# Altium PCB PCB.PcbDoc (part 1 of 2)
Units mil, origin at the board's own origin, x right, y up, seen from the top; angles counter-clockwise.
Board outline 1692.91 x 1181.1 mil, 2 copper layers (Top Layer, Bottom Layer); 68 components, 59 nets, 274 pads, 55 vias.
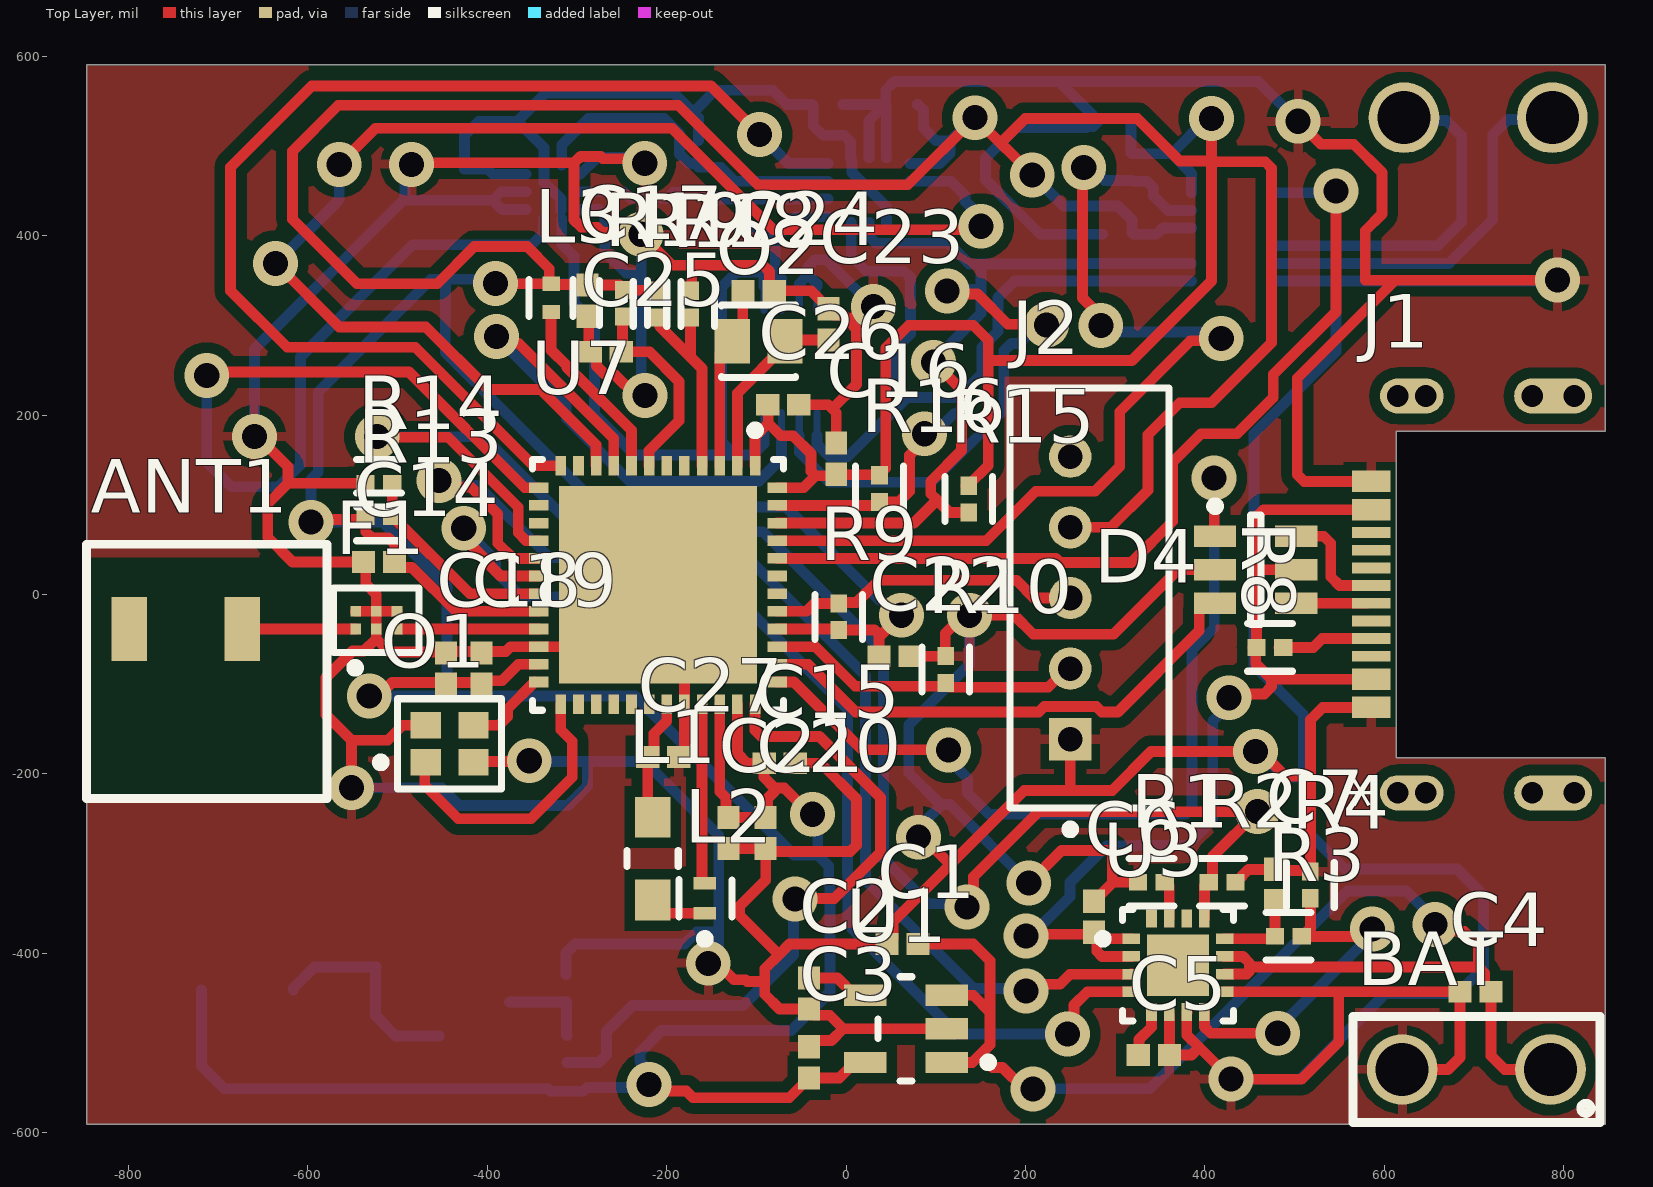
[diagram p0: Top Layer view]
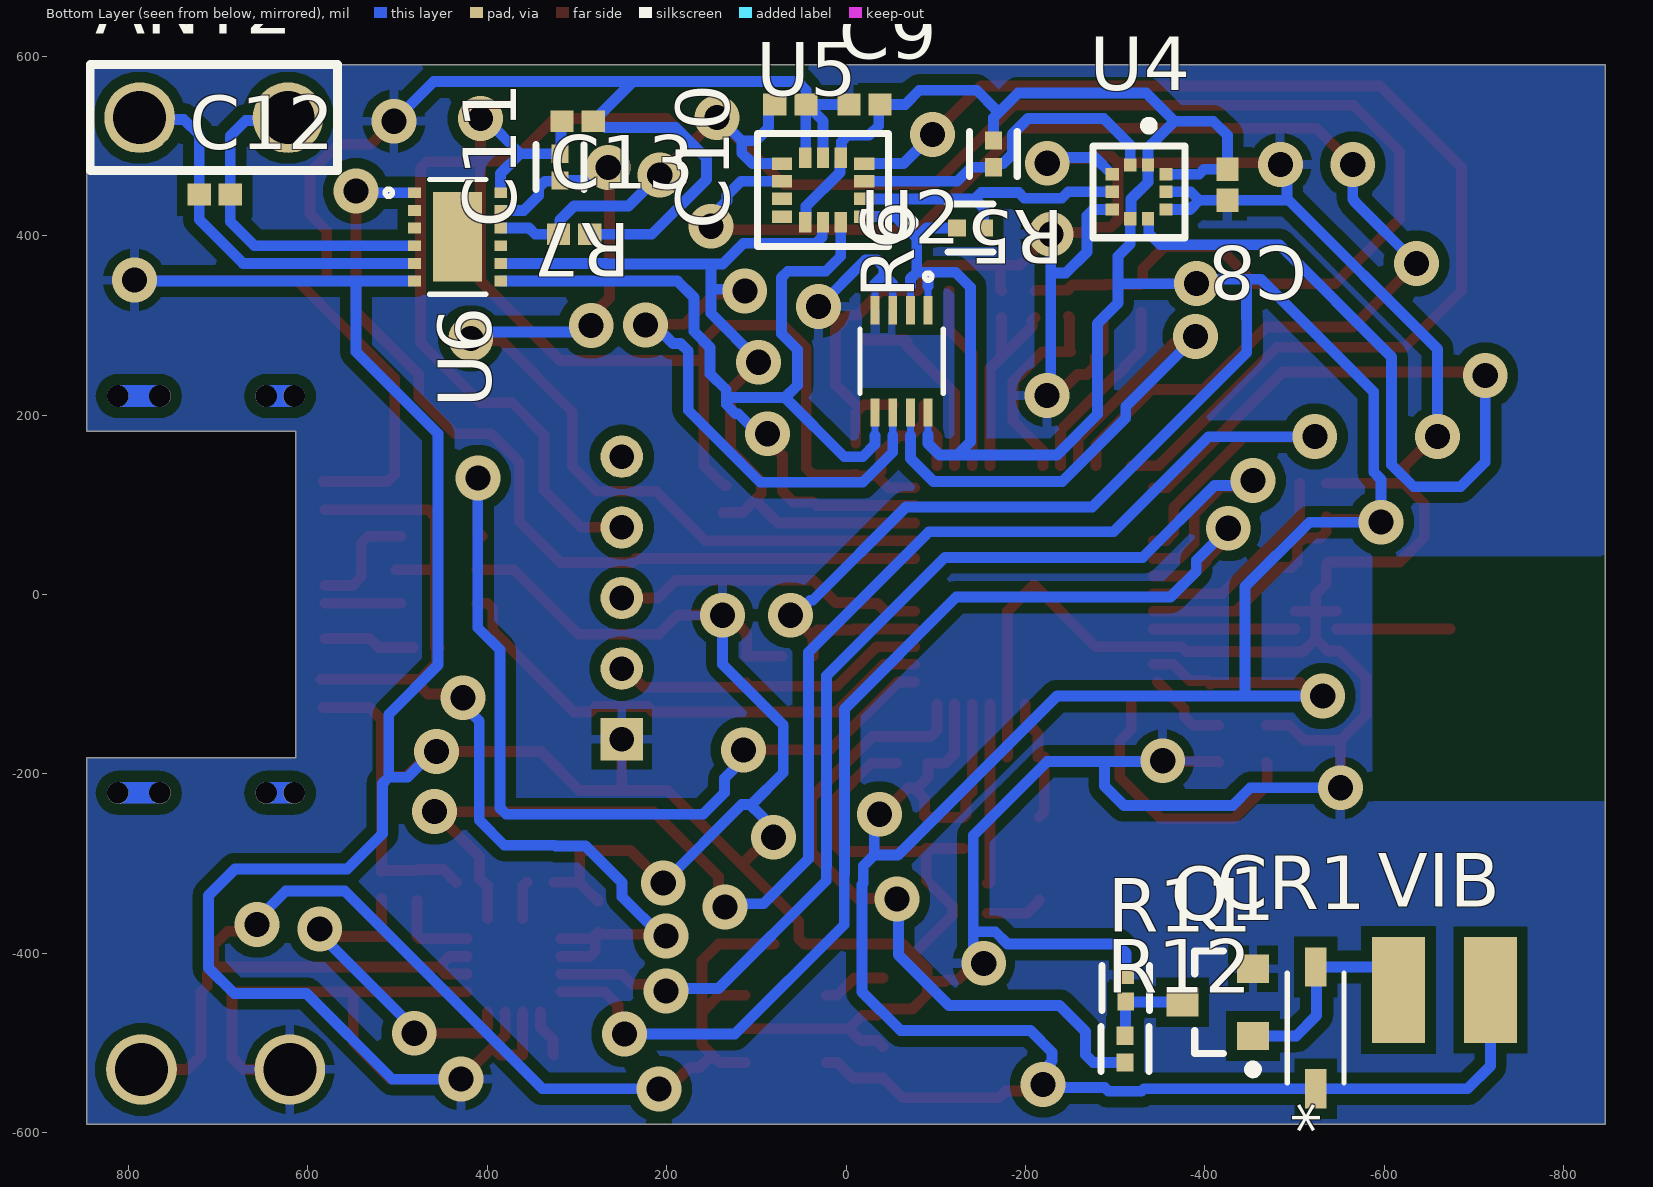
[diagram p1: Bottom Layer view, seen from below]
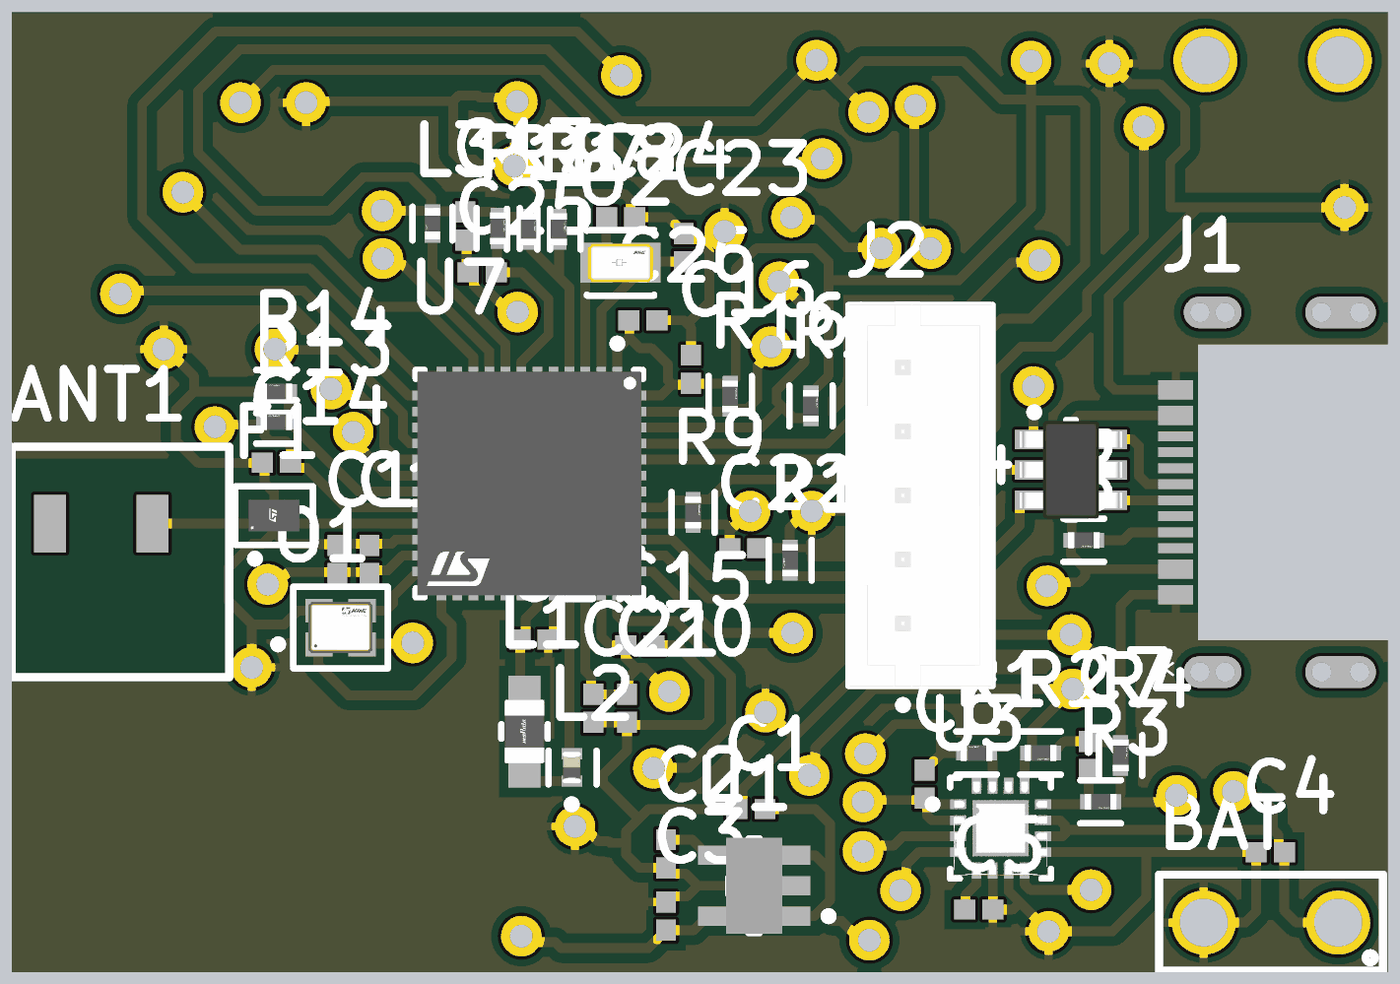
[diagram p2: 3D render of the assembled board from above, using the file's embedded part models]
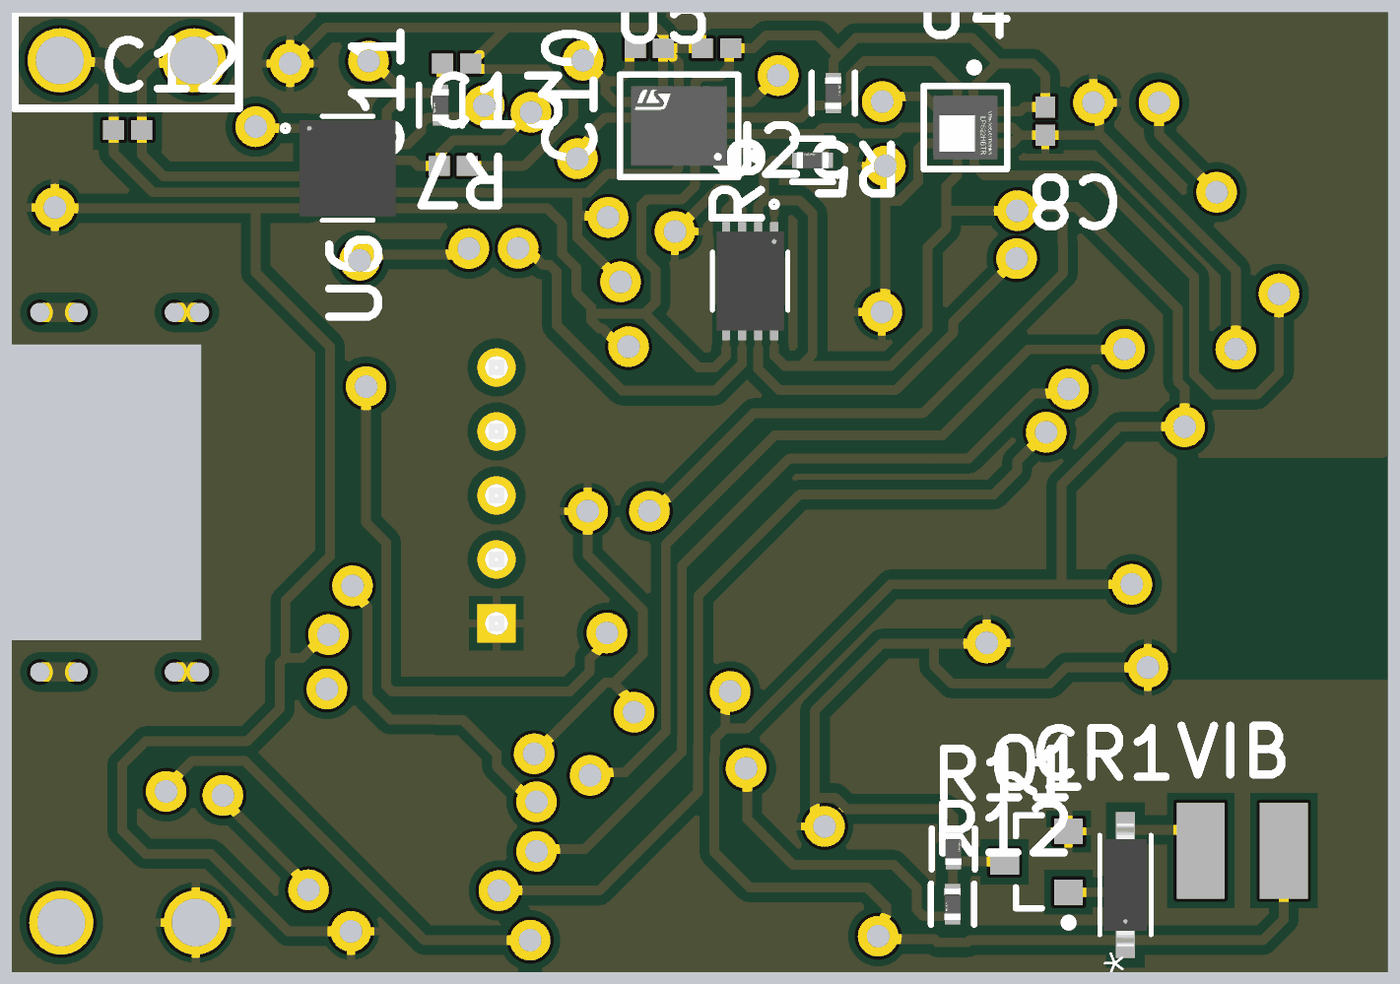
[diagram p3: 3D render of the assembled board from below, using the file's embedded part models]

## Layer stack, top to bottom
Top Solder: solder mask 0.4, Solder Resist, Dk 3.5
Top Layer: signal copper 1.4
Dielectric 1: dielectric 12.6, FR-4, Dk 4.8
Bottom Layer: signal copper 1.4
Bottom Solder: solder mask 0.4, Solder Resist, Dk 3.5

## Board outline
-846.46,-590.55 -846.46,590.55 846.46,590.55 846.46,182.09 613.19,182.09 613.19,-182.09 846.46,-182.09 846.46,-590.55

## Design rules (kind name [scope] priority, off if disabled: settings)
Clearance [All] p1: gap=12 ignorepadtopadclearanceinfootprint=FALSE except(0: Arc-Hole Track-Hole SMDPad-Hole THPad-Hole Via-Hole Fill-Hole Poly-Hole Region-Hole Text-Hole; 5: SMDPad-SMDPad SMDPad-THPad THPad-THPad; 6: Arc-SMDPad Arc-THPad Arc-Text Track-SMDPad Track-THPad Track-Text SMDPad-Text THPad-Text Via-Text Fill-Text Poly-Text Region-Text Text-Text; 7: Arc-Arc Arc-Track Arc-Via Track-Track Track-Via SMDPad-Via THPad-Via Via-Via)
PolygonConnect [All] p1: connectstyle=Relief reliefconductorwidth=10 reliefentries=4 polygonreliefangle="90 Angle" airgapwidth=10
RoomDefinition U_STM32WB55CGU6 [InComponentClass('U_STM32WB55CGU6')] p1: confinementstyle=ConfineIn formatcopy=TRUE lockcomponents=FALSE outline 168.31,-649.61 168.31,661.42 -885.83,661.42 -885.83,-649.61
RoomDefinition U_USB [InComponentClass('U_USB')] p2: confinementstyle=ConfineIn formatcopy=TRUE lockcomponents=FALSE outline 374.02,-275.59 937.01,-275.59 937.01,275.59 374.02,275.59
RoomDefinition U_LPS22HBTR [InComponentClass('U_LPS22HBTR')] p3: confinementstyle=ConfineIn formatcopy=TRUE lockcomponents=FALSE outline -200.79,373.52 -200.79,661.42 -562.99,661.42 -562.99,373.52
RoomDefinition U_M24512-DFMC6TG [InComponentClass('U_M24512-DFMC6TG')] p4: confinementstyle=ConfineIn formatcopy=TRUE lockcomponents=FALSE outline -168.34,373.03 -168.34,50.2 45.28,50.2 45.28,373.03
RoomDefinition U_LD3985M33R [InComponentClass('U_LD3985M33R')] p5: confinementstyle=ConfineIn formatcopy=TRUE lockcomponents=FALSE outline -108.27,-648.62 169.29,-648.62 169.29,-310.04 -108.27,-310.04
RoomDefinition U_SWD [InComponentClass('U_SWD')] p6: confinementstyle=ConfineIn formatcopy=TRUE lockcomponents=FALSE outline 374.02,-275.59 374.02,275.59 -47.24,275.59 -47.24,-275.59
RoomDefinition U_ST25DV64K-JFR6D3 [InComponentClass('U_ST25DV64K-JFR6D3')] p7: confinementstyle=ConfineIn formatcopy=TRUE lockcomponents=FALSE outline 169.29,660.43 169.29,275.59 937.01,275.59 937.01,660.43
RoomDefinition U_LSM6DSRXTR [InComponentClass('U_LSM6DSRXTR')] p8: confinementstyle=ConfineIn formatcopy=TRUE lockcomponents=FALSE outline -199.8,661.42 -199.8,373.52 169.29,373.52 169.29,661.42
RoomDefinition U_L6924D013TR [InComponentClass('U_L6924D013TR')] p9: confinementstyle=ConfineIn formatcopy=TRUE lockcomponents=FALSE outline 169.29,-649.61 937.01,-649.61 937.01,-275.59 169.29,-275.59
RoomDefinition U_VIBRO [InComponentClass('U_VIBRO')] p10: confinementstyle=ConfineIn formatcopy=TRUE lockcomponents=FALSE outline -790.35,-309.06 -790.35,-649.61 -252.95,-649.61 -252.95,-309.06
RoutingVias [All] p1: holewidth=28 width=50 viastyle="Through Hole" minholewidth=28 minwidth=50 maxholewidth=28 maxwidth=50
SolderMaskExpansion [All] p1: expansion=4 istentingtop=FALSE
Width [All] p1: maxlimit=12 minlimit=6 preferedwidth=8 minimp=50.000000 maximp=50.000000 favimp=50.000000
30 further rules are at their usual default settings.

## Classes and differential pairs
component class U_VIBRO: CR1 Q1 R11 R12 VIB
component class U_USB: D4 J1 R8
component class U_SWD: J2 R9 R10
component class U_STM32WB55CGU6: ANT1 C14 C15 C16 C17 C18 C19 C20 C21 C22 C23 C24 C25 C26 C27 F1 L1 L2 L3 O1 O2 R13 R14 R15 R16 R17 R18 R19 U7
component class U_ST25DV64K-JFR6D3: ANT2 C11 C12 C13 R7 U6
component class U_M24512-DFMC6TG: U2
component class U_LSM6DSRXTR: C9 C10 R5 R6 U5
component class U_LPS22HBTR: C8 U4
component class U_LD3985M33R: C1 C2 C3 U1
component class U_L6924D013TR: BAT C4 C5 C6 C7 R1 R2 R3 R4 U3

## Components (designator, comment, footprint, x,y, rotation, side; value= is the part's Value field where it differs from the comment)
ANT1 "KH3216-A55" KH3216-A55 -574.8,-231.44 r90 top
ANT2 "AT" AC 704.72,531.5 r0 bottom
BAT "Battery" Battery 702.76,-529.53 r180 top
C1 "10 uF" CAPC1005X55X25NL05T10 62.99,-389.76 r0 top
C2 "10 nF" CAPC1005X55X25NL05T10 -41.34,-444.88 r90 top
C3 "1 uF" CAPC1005X55X25NL05T10 -41.34,-521.65 r270 top
C4 "1 uF" CAPC1005X55X25NL05T10 701.77,-442.91 r0 top
C5 "330 pF" CAPC1005X55X25NL05T10 343.25,-513.39 r0 top
C6 "1 uF" CAPC1005X55X25NL05T10 276.57,-359.25 r90 top
C7 "1 uF" CAPC1005X55X25NL05T10 478.35,-323.82 r270 top
C8 "4.7 uF" CAPC1005X55X25NL05T10 -425.2,456.69 r90 bottom
C9 "100 nF" CAPC1005X55X25NL05T10 -20.67,546.26 r180 bottom
C10 "100 nF" CAPC1005X55X25NL05T10 62.01,546.26 r0 bottom
C11 "470 nF" CAPC1005X55X25NL05T10 299.21,527.56 r0 bottom
C12 "0 uF" CAPC1005X55X25NL05T10 703.74,445.87 r0 bottom
C13 "1 uF" CAPC1005X55X25NL05T10 303.15,401.57 r180 bottom
C14 "100 nF" CAPC1005X55X25NL05T10 -520.67,36.28 r180 top
C15 "100 nF" CAPC1005X55X25NL05T10 -73.82,-188.13 r180 top
C16 "100 nF" CAPC1005X55X25NL05T10 -10.83,151.44 r90 top
C17 "100 nF" CAPC1005X55X25NL05T10 -288.39,327.62 r90 top
C18 "100 nF" CAPC1005X55X25NL05T10 -445.87,-82.68 r90 top
C19 "100 pF" CAPC1005X55X25NL05T10 -406.5,-82.68 r270 top
C20 "4.7 uF" CAPC1005X55X25NL05T10 -89.57,-265.89 r90 top
C21 "100 nF" CAPC1005X55X25NL05T10 -130.91,-265.89 r270 top
C22 "100 nF" CAPC1005X55X25NL05T10 54.13,-68.9 r180 top
C23 "4.3 pF" CAPC1005X55X25NL05T10 -19.68,301.04 r90 top
C24 "4.3 pF" CAPC1005X55X25NL05T10 -97.44,338.44 r180 top
C25 "100 nF" CAPC1005X55X25NL05T10 -267.72,270.53 r0 top
C26 "100 nF" CAPC1005X55X25NL05T10 -69.88,211.47 r180 top
C27 "4.7 uF" CAPC1005X55X25NL05T10 -203.74,-181.24 r0 top
CR1 "BAT43W-7-F" SOD123_DIO -523.62,-483.27 r90 bottom
D4 "USBLC6-2SC6" STM-SOT23-6L_V 456.69,27.56 r0 top
F1 "MLPF-WB55-01E3" FP-MLPF-WB55-01E3-MFG -523.62,-28.68 r90 top
J1 "USB4510-03-1-A" USB4510-03-1-A_GCT 743.11,0 r90 top
J2 "B5B-PH-K-S(LF)(SN)" FP-B5B-PH-K-S_LF_SN-MFG 271.65,-3.94 r90 top
L1 "10uh" FP-LQM21FN_70-MFG -215.55,-294.43 r90 top
L2 "10nh" FP-LQG15WH_02-MFG -157.48,-338.72 r90 top
L3 "FBH1005-601Y" FP-BLM15-0_05-MFG -328.74,330.57 r270 top
O1 "NX2016SA-32MHZ" FP-NX2016SA-MFG -441.93,-166.48 r0 top
O2 "NX2012SA-32.768K" FP-NX2012SA-MFG -97.44,282.34 r180 top
Q1 "DMG3420U-7" DIOD-SOT23-3_B_V -414.37,-454.72 r0 bottom
R1 "130 Kohm" FP-RC1005-IPC_C 340.55,-320.87 r180 top
R2 "3.3 Kohm" FP-RC1005-IPC_C 419.29,-320.87 r0 top
R3 "1 Kohm" FP-RC1005-IPC_C 493.11,-380.91 r0 top
R4 "470 ohm" FP-RC1005-IPC_C 517.72,-323.82 r90 top
R5 "10 Kohm" FP-RC1005-IPC_C -164.37,491.14 r90 bottom
R6 "10 Kohm" FP-RC1005-IPC_C -138.78,408.46 r0 bottom
R7 "4.7 Kohm" FP-RC1005-IPC_C 318.9,476.38 r270 bottom
R8 "5.3 Kohm" FP-RC1005-IPC_C 472.44,-59.06 r0 top
R9 "10 Kohm" FP-RC1005-IPC_C -8.13,-24.86 r90 top
R10 "10 Kohm" FP-RC1005-IPC_C 111.22,-83.66 r270 top
R11 "100 Kohm" FP-RC1005-IPC_C -312.01,-438.98 r90 bottom
R12 "100 ohm" FP-RC1005-IPC_C -311.02,-506.89 r270 bottom
R13 "0 ohm" FP-RC1005-IPC_C -520.67,86.47 r180 top
R14 "0 ohm" FP-RC1005-IPC_C -520.67,123.88 r180 top
R15 "? ohm" FP-RC1005-IPC_C 136.81,106.3 r90 top
R16 "? ohm" FP-RC1005-IPC_C 37.4,117.97 r90 top
R17 "0 ohm" FP-RC1005-IPC_C -210.63,323.68 r90 top
R18 "0 ohm" FP-RC1005-IPC_C -173.23,323.68 r90 top
R19 "100 Kohm" FP-RC1005-IPC_C -248.03,324.66 r90 top
U1 "LD3985M33R" FP-SOT23-5L-7049676-MFG 66.93,-484.25 r180 top
U2 "M24512-DFMC6TG" UFDFPN8_STM -62.01,259.84 r270 bottom
U3 "L6924D013TR" FP-VFQFPN16-7185330-MFG 370.08,-413.39 r0 top
U4 "LPS22HBTR" FP-HLGA-10L-8479831-0 -326.77,448.82 r270 bottom
U5 "LSM6DSRXTR" FP-LGA-14L-DM00249496-MFG 25.59,450.79 r0 bottom
U6 "ST25DV64K-JFR6D3" UFDFPN12_3X3_STM 433.07,398.62 r180 bottom
U7 "STM32WB55CGU6" FP-STM32WB55CGU6-MFG -209.65,10.69 r270 top
VIB "VIBRO" VIBRO -667.32,-440.94 r90 bottom

## Footprints (in the part's own frame and the unit in brackets; to place one, negate y for a bottom-side part, rotate by r counter-clockwise, add the part's x,y. Pads: shape width x height; smd on the part's side, far side on the other; paste and mask are expansions set on the pad)
AC [mm]
  round 2 hole 1.5: 1(-2.1,0) 2(2.1,0)
  silkscreen extent -3.5,-1.5 3.5,1.5
Battery [mm]
  round 2 hole 1.5: 1(-2.1,0) 2(2.1,0)
  silkscreen extent -3.5,-1.5 3.5,1.5
CAPC1005X55X25NL05T10 [mm] "Chip Capacitor, 2-Leads, Body 1.00x0.50mm, IPC Medium Density"
  rect 0.66x0.62 smd: 1(-0.44,0) 2(0.44,0)
  body extent -0.53,-0.28 0.53,0.27, height 0.55
DIOD-SOT23-3_B_V [mm] "SOT23, 3-Leads, Body 2.9x1.3mm, Pitch 0.95mm"
  rect 0.9x0.8 smd: 1(-1,0.95) 2(-1,-0.95) 3(1,0)
  silkscreen extent -1.12,-1.45 0.65,2.02, body extent -0.65,-1.45 0.65,1.45, height 1.17
FP-B5B-PH-K-S_LF_SN-MFG [mm]
  rect 1.2x1.2 hole 0.7 paste-1000 mask+0: 1(-4,0.55)
  round 1.2 hole 0.7 paste-1000 mask+0: 2(-2,0.55) 3(0,0.55) 4(2,0.55) 5(4,0.55)
  silkscreen extent -6.67,-2.25 5.95,2.25, body extent -6.05,-2.35 6.05,2.35, height 0.25
FP-BLM15-0_05-MFG [mm]
  rect 0.4x0.5 smd paste+0 mask+0: 1(-0.4,0) 2(0.4,0)
  silkscreen extent -0.53,-0.63 0.52,0.63, body extent -0.7,-0.38 0.7,0.38, height 0.25
FP-HLGA-10L-8479831-0 [mm]
  rect 0.375x0.35 smd paste+0 mask+0: 1(-0.763,0.25) 2(-0.763,-0.25) 6(0.763,-0.25) 7(0.763,0.25)
  rect 0.35x0.375 smd paste+0 mask+0: 3(-0.5,-0.763) 4(0,-0.763) 5(0.5,-0.763) 8(0.5,0.763) 9(0,0.763) 10(-0.5,0.763)
  silkscreen extent -2,-1.3 1.3,1.3, body extent -1,-1 1,1, height 0.8
FP-LGA-14L-DM00249496-MFG [mm]
  rect 0.575x0.35 smd paste-1000 mask+0: 1(-1.162,0.75) 2(-1.162,0.25) 3(-1.162,-0.25) 4(-1.162,-0.75) 8(1.162,-0.75) 9(1.162,-0.25) 10(1.162,0.25) 11(1.162,0.75)
  rect 0.35x0.575 smd paste-1000 mask+0: 5(-0.5,-0.913) 6(0,-0.913) 7(0.5,-0.913) 12(0.5,0.913) 13(0,0.913) 14(-0.5,0.913)
  silkscreen extent -2.57,-1.6 1.85,1.6, body extent -1.5,-1.25 1.5,1.25, height 0.86
FP-LQG15WH_02-MFG [mm]
  rect 0.35x0.65 smd paste+0 mask+0: 1(-0.425,0) 2(0.425,0)
  silkscreen extent -1.27,-0.78 0.53,0.72, body extent -0.7,-0.43 0.7,0.43, height 0.25
FP-LQM21FN_70-MFG [mm]
  rect 1.15x1 smd paste+0 mask+0: 1(-1.175,0) 2(1.175,0)
  silkscreen extent -0.23,-0.72 0.23,0.72, body extent -1.85,-0.82 1.85,0.82, height 0.25
FP-MLPF-WB55-01E3-MFG [mm]
  rect 0.3x0.3 smd paste-1000 mask-1000: A1(-0.25,0.587) A2(-0.25,0) A3(-0.25,-0.587) B1(0.25,0.587) B2(0.25,0) B3(0.25,-0.587)
  silkscreen extent -1.47,-1.21 0.91,1.21, body extent -1.01,-1.31 1.01,1.31, height 0.25
FP-NX2012SA-MFG [mm]
  rect 1x1.25 smd paste+0 mask+0: 1(-0.75,0) 2(0.75,0)
  silkscreen extent -1.05,-1.02 1.05,1.02, body extent -1.35,-0.72 1.35,0.72, height 0.25
FP-NX2016SA-MFG [mm]
  rect 0.85x0.75 smd paste+0 mask+0: 1(-0.675,-0.525) 2(0.675,-0.525) 3(0.675,0.525) 4(-0.675,0.525)
  silkscreen extent -2.07,-1.28 1.48,1.28, body extent -1.2,-1 1.2,1, height 0.25
FP-RC1005-IPC_C [mil]
  rect 20.29x18.6 smd paste+0 mask+0: 1(-14.9,0) 2(14.9,0)
  silkscreen extent -25,-27 25,27, body extent -29,-15 29,15, height 10
FP-SOT23-5L-7049676-MFG [mm]
  rect 1.2x0.6 smd paste+0 mask+0: 1(-1.15,0.95) 2(-1.15,0) 3(-1.15,-0.95) 4(1.15,-0.95) 5(1.15,0.95)
  silkscreen extent -2.45,-1.48 0.8,1.47, body extent -1.85,-1.58 1.85,1.57, height 0.25
FP-STM32WB55CGU6-MFG [mm]
  rect 0.55x0.3 smd paste+0 mask+0: 1(-3.375,2.75) 2(-3.375,2.25) 3(-3.375,1.75) 4(-3.375,1.25) 5(-3.375,0.75) 6(-3.375,0.25) 7(-3.375,-0.25) 8(-3.375,-0.75) 9(-3.375,-1.25) 10(-3.375,-1.75) 11(-3.375,-2.25) 12(-3.375,-2.75) 25(3.375,-2.75) 26(3.375,-2.25) 27(3.375,-1.75) 28(3.375,-1.25) 29(3.375,-0.75) 30(3.375,-0.25) 31(3.375,0.25) 32(3.375,0.75) 33(3.375,1.25) 34(3.375,1.75) 35(3.375,2.25) 36(3.375,2.75)
  rect 0.3x0.55 smd paste+0 mask+0: 13(-2.75,-3.375) 14(-2.25,-3.375) 15(-1.75,-3.375) 16(-1.25,-3.375) 17(-0.75,-3.375) 18(-0.25,-3.375) 19(0.25,-3.375) 20(0.75,-3.375) 21(1.25,-3.375) 22(1.75,-3.375) 23(2.25,-3.375) 24(2.75,-3.375) 37(2.75,3.375) 38(2.25,3.375) 39(1.75,3.375) 40(1.25,3.375) 41(0.75,3.375) 42(0.25,3.375) 43(-0.25,3.375) 44(-0.75,3.375) 45(-1.25,3.375) 46(-1.75,3.375) 47(-2.25,3.375) 48(-2.75,3.375)
  rect 5.6x5.6 smd paste+0 mask+0: 49(0,0)
  silkscreen extent -4.5,-3.55 3.55,3.55, body extent -3.75,-3.75 3.75,3.75, height 0.25
FP-VFQFPN16-7185330-MFG [mm]
  rect 0.5x0.3 smd paste+0 mask+0: 1(-1.325,0.75) 2(-1.325,0.25) 3(-1.325,-0.25) 4(-1.325,-0.75) 9(1.325,-0.75) 10(1.325,-0.25) 11(1.325,0.25) 12(1.325,0.75)
  rect 0.3x0.5 smd paste+0 mask+0: 5(-0.75,-1.325) 6(-0.25,-1.325) 7(0.25,-1.325) 8(0.75,-1.325) 13(0.75,1.325) 14(0.25,1.325) 15(-0.25,1.325) 16(-0.75,1.325)
  rect 1.75x1.75 smd paste+0 mask+0: 17(0,0)
  silkscreen extent -2.25,-1.58 1.58,1.58, body extent -1.68,-1.68 1.68,1.68, height 0.25
KH3216-A55 [mm]
  rect 1.8x1 smd: 1(4.9,2.5) 2(4.9,5.7)
  silkscreen extent 0.1,0.1 7.3,6.9
SOD123_DIO [mm]
  rect 1.111x0.601 smd paste+0 mask+0: 1(-1.725,0) 2(1.725,0)
  silkscreen extent -1.55,-0.8 1.55,0.8, body extent -1.92,-0.67 1.92,0.67, height 0.81
STM-SOT23-6L_V [mm] "SOT23, 6-Leads, Body 3.05x1.75mm, Pitch 0.95mm"
  rect 1.2x0.6 smd: 1(-1.15,0.95) 2(-1.15,0) 3(-1.15,-0.95) 4(1.15,-0.95) 5(1.15,0) 6(1.15,0.95)
  silkscreen extent -1.27,-1.55 0.15,1.92, body extent -1.6,-1.53 1.6,1.53, height 1.45
UFDFPN8_STM [mil]
  rect 31.51x9.83 smd paste+0 mask+0: 1(-57.06,29.55) 2(-57.06,9.85) 3(-57.06,-9.85) 4(-57.06,-29.55) 5(57.06,-29.55) 6(57.06,-9.85) 7(57.06,9.85) 8(57.06,29.55)
  silkscreen extent -99,-46 36,46, body extent -61,-41 61,41, height 24
UFDFPN12_3X3_STM [mil]
  rect 14x12 smd paste+0 mask+0: 1(-48,49.21) 2(-48,29.53) 3(-48,9.84) 4(-48,-9.84) 5(-48,-29.53) 6(-48,-49.21) 7(48,-49.21) 8(48,-29.53) 9(48,-9.84) 10(48,9.84) 11(48,29.53) 12(48,49.21)
  rect 55x100 smd paste+0 mask+0: 13(0,0)
  silkscreen extent -81,-64 31,64, body extent -59,-59 59,59, height 24
USB4510-03-1-A_GCT [mil]
  oval 39x71 smd: 13(-221.25,112.25) 14(221.25,112.25)
  oval 39x87 smd: 15(-221.25,-45.2) 16(221.25,-45.2)
  rect 24x43 smd paste+0 mask+0: A1-B12(-126,157.5) A4-B9(-94.5,157.5) B1-A12(126,157.5) B4-A9(94.5,157.5)
  rect 12x43 smd paste+0 mask+0: A5(-49.2,157.5) A6(-9.8,157.5) A7(9.9,157.5) A8(49.3,157.5) B5(69,157.5) B6(29.6,157.5) B7(-29.5,157.5) B8(-69,157.5)
  round 24 hole 24 unplated: S_1_H1(-221.25,127.75) S_1_H2(-221.25,96.75) S_2_H1(221.25,127.75) S_2_H2(221.25,96.75) S_3_H1(-221.25,-21.7) S_3_H2(-221.25,-68.7) S_4_H1(221.25,-21.7) S_4_H2(221.25,-68.7)
  Multi-Layer lines w24: -221.25,127.75 -221.25,96.75 ; 221.25,127.75 221.25,96.75 ; -221.25,-21.7 -221.25,-68.7 ; 221.25,-21.7 221.25,-68.7
  body extent 0,0 10,10, height 10
VIBRO [mm]
  rect 3x1.5 smd: 1(0,1.3) 2(0,-1.3)

## Part data
C1 C2 C3 C4 C5 C6 C7 C8 C9 C10 C11 C12 C13 C14 C15 C16 C17 C18 C19 C20 C21 C22 C23 C24 C25 C26 C27: library part CMP-2008-04515-1, Manufacturer=Murata, Part Number=GRM155F50J684ZE01D
CR1: Mfr_Name="Diodes Inc", Copyright="Copyright (C) 2023 Ultra Librarian. All rights reserved.", Manufacturer_Part_Number=BAT43W-7-F, RefDes=RefDes, Type=DEV
D4: library part CMP-2000-05378-1, "Very low capacitance ESD protection, 3.5 pF, -40 to 125 degC, 6-Pin SOT23, RoHS, Tape and Reel", Capacitance Value=3.5pF, Clamping Voltage=17V, Leakage Current=0.15uA, Manufacturer=STMicroelectronics, Operating Temp Range=-40Cto125C, Operating Temperature Classification=Automotive, Operating Temperature Max Deg. C=125C, Operating Temperature Min Deg. C=-40C, Package / Case=SOT-23, Package Description="6-Pin Small Outline Transistor, Body 2.925 x 1.625 mm, Pitch 0.95 mm", Package Reference=SOT23-6L, Peak Pulse Current=5A, Reverse Breakdown Voltage=6V, Reverse Stand-off Voltage=5V, Test Current (It)=1mA, Clamping Voltage (Max)=17V, Configuration=Dual, Datasheet URL=http://www.st.com/st-web-ui/static/active/en/resource/technical/document/datasheet/CD00050750.pdf, Datasheet Version="Rev. 5, 10/2011", Direction Type=Uni-Directional, Leakage Current (Max)=0.15uA, Manufacturer URL=http://www.st.com/, Mounting=SurfaceMount, Mounting Style=SurfaceMount, Number of Elements=1, Packaging=TapeandReel, Pin Count=6, Polarity=Uni-Directional, Product Depth (mm)=1.75mm, Product Height (mm)=1.3mm, Product Length (mm)=3.05mm, Rad Hardened=No, Suppressor Type=DiodeArrays, Working Voltage=5V, Working Voltage (Max)=5V
F1: library part CMP-12074-000002-1, "RF FILTER LOW PASS 2.45GHZ 6SMD"
J1: Mfr_Name="Global Connector Technology", Copyright="Copyright (C) 2023 Ultra Librarian. All rights reserved.", Manufacturer_Part_Number=USB4510-03-1-A, RefDes=RefDes, Type=Type
J2: library part CMP-2000-05908-2, "CONN HEADER VERT 5POS 2MM", Color=Natural, Contact Resistance=20mR, Current Rating=2A, Flammability Rating="UL94 V-0", Housing Color=White, Insulation Resistance=1MR, Max Operating Temperature=85°C, Max Voltage Rating (AC)=100V, Min Operating Temperature=-25°C, Connector Type=Header, Contact Finish - Mating=TIN, Contact Material=Brass, Contact Mating Length=0.13inch, Contact Plating=Tin, Contact Shape=Square, Contact Type="Male Pin", Depth=4.5mm, Fastening Type=Detent, Gender=Male, Height=9.4mm, Housing Material=Polyamide, Insulation Color=Natural, Insulation Material=Nylon, Lead Free="Lead Free", Lead Pitch=2mm, Length=11.9mm, Mated Stacking Heights=8mm, Material=Polyamide, Max Current Rating=2A, Mount="Through Hole", Number of Contacts=5, Number of Pins=5, Number of Poles=5, Number of Positions=5, Number of Rows=1, Orientation=Straight, Packaging=Bulk, Pitch=2mm, REACH SVHC="No SVHC", Series=PH, Termination=Solder, Voltage Rating=100V, Voltage Rating (AC)=100V, Width=4.5mm, Working Voltage=100V
L1: library part CMP-2000-06587-2, "FIXED IND 10UH 100MA 780MOHM SMD", Case Code (Imperial)=0805, Case Code (Metric)=2012, Current Rating=100mA, DC Resistance (DCR)=780mR, Inductance=10uH, Max Operating Temperature=125°C, Min Operating Temperature=-55°C, Package Quantity=3000, Self Resonant Frequency=15MHz, Test Frequency=1MHz, Tolerance=20%, Case/Package=0805, Core Material=Ferrite, DC Current=100mA, Depth=1.45mm, Height=1.45mm, Height - Seated (Max)=0.057inch, Lead Free="Lead Free", Length=2.2mm, Max DC Current=100mA, Military Standard=Not, Mount="Surface Mount", Packaging="Tape and Reel", Radiation Hardening=No, Rated Current-Max=100mA, RoHS Compliant=Yes, Saturation Current=100mA, Series=LQM21F_70, Shielding=Shielded, Termination=SMD/SMT, Width=0.049inch
L2: library part CMP-06042-005237-1, "Multilayer type Inductor for Automotive 10nH ±5% 0.19Ω 500mA 0402", Case Code (Imperial)=0402, Case Code (Metric)=1005, Current Rating=500mA, DC Resistance (DCR)=190mR, Inductance=10nH, Max Operating Temperature=125°C, Min Operating Temperature=-55°C, Ratings=AEC-Q200, Self Resonant Frequency=3.3GHz, Test Frequency=100MHz, Tolerance=5%, Case/Package=0402, Core Material=Air, Mount="Surface Mount", Packaging="Cut Tape", Shielding=Unshielded
L3: library part CMP-0686-00187-4, "Chip Ferrite Bead, 0402, 600Ω @ 100MHz, 0.52Ω, 25%, 300mA", Case Code (Imperial)=0402, Case Code (Metric)=1005, Current Rating=300mA, DC Resistance (DCR)=520mR, DC Resistance-Max=600mR, Frequency=100MHz, Max Operating Temperature=125°C, Min Operating Temperature=-55°C, Package Quantity=10000, Tolerance=25%, Case/Package=0402, Core Material=Ferrite, DC Current=300mA, Depth=0.55mm, Height=0.5mm, Impedance=600R, Lead Free="Lead Free", Length=1mm, Material=Steel, Max Current Rating=300mA, Max DC Current=300mA, Military Standard=Not, Number of Circuits=1, Number of Lines=1, Number of Pins=2, Packaging="Tape and Reel", Radiation Hardening=No, REACH SVHC="No SVHC", RoHS Compliant=Yes, Series=BLM15AG_SN, Shielding=Unshielded, Termination=SMD/SMT, Test Frequency=100MHz, Width=0.5mm
O1: library part CMP-200220-000017-1, "CRYSTAL 32.0000MHZ 8PF SMD", Case/Package=SMD/SMT, ESR (Equivalent Series Resistance)=60R, Frequency=32MHz, Load Capacitance=8pF, Max Operating Temperature=125°C, Min Operating Temperature=-40°C, Ratings=AEC-Q200, Mount="Surface Mount", Packaging="Tape and Reel"
O2: library part CMP-200220-000019-1, "CRYSTAL 32.7680KHZ 12.5PF SMD", Case/Package=SMD/SMT, ESR (Equivalent Series Resistance)=80kR, Frequency=32.768kHz, Frequency Tolerance=20ppm, Load Capacitance=12.5pF, Max Operating Temperature=85°C, Min Operating Temperature=-40°C, Height=0.024inch, Length=0.081inch, Mount="Surface Mount", Packaging="Cut Tape", RoHS Compliant=Yes, Series=NX2012SA, Width=0.047inch
Q1: library part CMP-2000-06172-1, "N-Channel Enhancement Mode MOSFET, 20 V, -55 to 150 degC, 3-Pin SOT23, RoHS, Tape and Reel", Drain-Source On Resistance-Max=29mO, Drain-to-Source Voltage [Vdss]=20V, Manufacturer="Diodes Inc", Package Description="3-Pin Small Outline Transistor, Body 2.9 x 1.3 mm, Pitch 0.96 mm", Package Reference=SOT23-3, Rated Power Dissipation=740mW, Channel Type=N-Channel, Datasheet URL=http://www.diodes.com/_files/datasheets/ds31867.pdf, Datasheet Version="Rev. 5-2, 09/2013", Manufacturer URL=http://www.diodes.com/, Mounting Technology=SurfaceMount, Qg Gate Charge=5.4nC
R1 R2 R3 R4 R5 R6 R7 R8 R9 R10 R11 R12 R13 R14 R15 R16 R17 R18 R19: library part CMP-13261-000953-1, "Res Thick Film 0402 1.87kΩ 1% 0.063W ±100ppm/°C Molded SMD T/R", Case Code (Imperial)=0402, Case Code (Metric)=1005, Max Operating Temperature=155°C, Max Power Dissipation=63mW, Min Operating Temperature=-55°C, Package Quantity=1, Resistance=1.87kR, Temperature Coefficient=100ppm/°C, Tolerance=1%, Voltage Rating (DC)=50V, Case/Package=0402, Composition="Thick Film", Contact Plating=Tin, Depth=0.5mm, Features="Moisture Resistant", Height=0.016inch, Lead Free="Lead Free", Length=1mm, Military Standard=Not, Number of Terminations=2, Packaging="Tape and Reel", Power Rating=63mW, Radiation Hardening=No, Width=0.02inch
U1: library part CMP-0244-00328-2, "IC REG LINEAR 3.3V 150MA SOT23-5", Case/Package=SOT-23, Dropout Voltage=60mV, Input Bias Current=85uA, Max Input Voltage=6V, Max Operating Temperature=125°C, Max Output Current=150mA, Min Current Limit=300mA, Min Input Voltage=2.5V, Min Operating Temperature=-40°C, Min Output Voltage=3.3V, Output Voltage Accuracy=2%, Package Quantity=1, Quiescent Current=150uA, Accuracy=2%, Height=1.3mm, Lead Free="Lead Free", Length=3mm, Mount="Surface Mount", Number of Outputs=1, Number of Pins=5, Number of Regulators=1, Output Current=150mA, Output Type=Fixed, Output Voltage=3.3V, Packaging="Tape and Reel", Polarity=Positive, Radiation Hardening=No, Width=1.75mm
U2 U6: Mfr_Name=STMicroelectronics, Copyright="Copyright (C) 2023 Ultra Librarian. All rights reserved.", RefDes=RefDes, Type=DEV
  U2: Manufacturer_Part_Number=M24512-DFMC6TG
  U6: Manufacturer_Part_Number=ST25DV64K-JFR6D3
U3: library part CMP-12147-000005-1, "IC BATT CHRGR ION/POLY 16-VFQFPN", Manufacturer=STMicroelectronics, Max Junction Temp=+125°C, Max Power Dissipation=0.67W, Max Supply Voltage=12V, Min Supply Voltage=2.5V, Nominal Supply Current=1.8mA, Output Current=975mA, Output Voltage=4.2V, Package=VFQFPN16-7185330, Temperature="-40°C to +125°C", Temperature Range Low=-40°C, Automotive=No, Category=IC, ComponentLink2Description=Datasheet, ComponentLink2URL=https://www.st.com/resource/en/datasheet/l6924d.pdf, Device Class L1="Integrated Circuits (ICs)", Device Class L2="Power Management ICs", Device Class L3="Battery Management", Digikey Description="IC BATT CHRGR ION/POLY 16-VFQFPN", Footprint Url=https://www.st.com/resource/en/datasheet/l6738.pdf, Height=1mm, Ipc Land Pattern Name=QFN50P300X300X90-16, Lead Free=Yes, Manufacturer Part Number=L6924D013TR, Mouser Description="Battery Management Battery Charger Sys Li-Ion/Li-Poly", Number Of Cells=1, Number of Outputs=1, Octopart=https://octopart.com/l6924d013tr-stmicroelectronics-421996, RoHS=TRUE, Standoff Height=0.02mm, Temperature Range High=+125°C
U4: library part CMP-12182-000004-1, "MEMS NANO PRESSURE SENSOR: 260-1", Manufacturer=STMicroelectronics, Max Supply Voltage=3.6V, Min Supply Voltage=1.7V, Operating Supply Current=3-12uA, Package=HLGA-10L-8479831, Temperature="-40°C to +85°C", Temperature Range High=+85°C, Temperature Range Low=-40°C, Automotive=No, Category=IC, ComponentLink2Description=Datasheet, ComponentLink2URL=https://www.st.com/resource/en/datasheet/lps22hb.pdf, Device Class L1=Sensors, Device Class L2="Pressure Sensors", Device Class L3=unset, Digikey Description="MEMS NANO PRESSURE SENSOR: 260-1", Footprint Url=https://www.st.com/content/ccc/resource/technical/document/technical_note/73/17/9c/16/dd/96/4a/01/CD00134799.pdf/files/CD00134799.pdf/jcr:content/translations/en.CD00134799.pdf, Height=0.8mm, Lead Free=Yes, Manufacturer Part Number=LPS22HBTR, Octopart=https://octopart.com/lps22hbtr-stmicroelectronics-51851131, Port Style="No Port", RoHS=TRUE, Sensor Output=I2C,SPI
U5: library part CMP-12177-000016-1, "CONSUMER MEMS", RoHS Compliant=Yes
U7: library part CMP-12105-000013-1, "ULTRA-LOW-POWER DUAL CORE ARM CO", Ambient Temperature Range High=+85°C, Ambient Temperature Range Low=-40°C, Frequency=64MHz, Manufacturer=STMicroelectronics, Max Junction Temp=+105°C, Max Supply Voltage=3.6V, Min Supply Voltage=1.71V, Package=UFQFPN48, Temperature="-40°C to +105°C", Automotive=No, Category=IC, ComponentLink2Description=Datasheet, ComponentLink2URL=https://www.st.com/resource/en/datasheet/stm32wb55cg.pdf, Core Architecture="ARM Cortex-M4", Data Bus Width=32bits, Device Class L1="Integrated Circuits (ICs)", Device Class L2="Embedded Processors and Controllers", Device Class L3=Microcontrollers, Digikey Description="ULTRA-LOW-POWER DUAL CORE ARM CO", Height=0.65mm, Interface=I2C,SPI,UART,USART,2-Wire,USB,IrDA,Other, Lead Free=Yes, Manufacturer Part Number=STM32WB55CGU6, Memory Size=1MBytes, Memory Type=FLASH, Number Of A/D Converters=1, Number Of Adc Channels=13, Number Of Cores=1, Number Of I2C Channels=2, Number Of I/Os=30, Number Of Pwm Channels=14, Number Of Spi Channels=1, Number Of Timers/Counters=6, Number Of Uart Channels=2, Number Of Usb Channels=1, Octopart=https://octopart.com/stm32wb55cgu6-stmicroelectronics-98750847, Ram Size=256KBytes, RoHS=TRUE, Standoff Height=0mm, Temperature Range High=+105°C, Temperature Range Low=-40°C

## Via types
v1: diameter 50, hole 28, Top Layer to Bottom Layer, 55 vias

## Nets (pads, with @x,y where several pads share a name; then routed paths per layer and width w, separated by ;. In a path a pad name is that pad's centre, name@x,y a point inside that pad or via, vN(x,y) a via of type N, cw(c..) or ccw(c..) an arc to the next point about the centre after c; other vN are vias at no path point)
+3.3: C3.2 C8.2 C9.2 C10.2 C11.2 C13.1 C14.1 C15.2 C16.1 C17.2 C18.1 C19.2 C20.2 C21.1 C22.2 C26.2 CR1.1 J2.4 L3.1 R5.2 R6.2 R7.1 R9.1 R13.2 R15.2 R16.2 R17.2 R19.2 U1.5 U2.1 U2.2 U2.8 U4.1 U4.6 U4.10 U5.1 U5.5 U5.8 U5.12 U6.10 U6.12 U7.1 U7.20 U7.23 U7.34 U7.35 U7.40 U7.48 VIB.2 | length 10584.8
  Top Layer w12: v1(-596.46,80.57) -593.5,83.52 -538.53,83.52 R13.2 -535.43,86.33 -535.43,70.02 -528.4,62.99 -509.98,62.99 -502.95,55.96 C14.1@-502.95,36.67 ; v1(-531.5,-113.33) -521.21,-113.33 -506.06,-98.17 C19.2@-406.5,-98.17 ; C14.1 C14.1@-502.95,36.67 ; C19.2 -402.79,-96.29 -383.55,-96.29 -365.16,-77.9 U7.23 ; v1(-390.75,346.46) -390.68,346.39 L3.1@-328.9,346.39 ; U7.20 -434.9,-18.84 -483.81,30.07 -496.35,30.07 C14.1@-502.95,36.67 ; v1(-219.49,-546.26) -212.22,-553.53 -177.98,-553.53 -170.49,-561.02 -63.39,-561.02 -48.33,-545.97 -47.54,-545.97 -41.34,-539.76 C3.2 -7.48,-538.98 9.84,-521.65 U1.5 ; R17.2 -211.12,339.08 -247.54,339.08 R19.2 -248.03,340.41 -252.56,344.94 C17.2 -289.07,345.63 -328.05,345.63 L3.1 -328.81,346.39 L3.1@-328.9,346.39 ; U7.34 -140.75,-219.63 -133.86,-226.52 -133.86,-245.61 C21.1 C20.2 -87.6,-246.6 -87.6,-227.5 -79.72,-219.63 -79.72,-215.69 ; U7.35 -121.06,-177.34 -110.27,-188.13 C15.2 -91.54,-188.53 -91.54,-203.88 -79.72,-215.69 ; U7.1 -101.38,176.04 -86.61,190.81 ; C26.2 -86.61,210.88 -86.61,190.81 ; U7.40 -76.68,-38.62 -8.76,-38.62 -7.87,-39.51 31.89,-39.51 36.81,-44.43 C22.2 ; U7.48 -47.36,118.95 -34,132.32 ; v1(-37.4,-245.08) -39.44,-245.08 -68.82,-215.69 -79.72,-215.69 ; C16.1 -12.62,132.32 -34,132.32 ; C16.1@-10.21,133.49 36.78,133.49 R16.2 37.4,133.72 44.29,140.61 44.29,274.61 69.88,300.2 141.73,300.2 158.46,283.46 158.46,260.83 ; 36.81,-47.45 61.01,-23.25 v1(62.01,-23.25) ; R15.2@134.28,121.49 133.86,121.06 135.83,121.06 158.46,143.7 158.46,260.83 ; v1(207.68,467.52) 207.68,468.06 178.35,497.39 177.81,497.39 172.24,502.95 ; J2.4 295.28,74.8 336.61,116.14 336.61,178.15 372.05,213.58 407.48,213.58 474.41,280.51 474.41,475.25 467.38,482.28 408.46,482.28 407.48,483.27 ; v1(407.48,530.51) 407.48,483.27 ; L3.1@-328.9,346.39 -330.71,348.19 -330.71,363.19 -355.32,387.8 -414.37,387.8 -455.71,346.46 -545.28,346.46 -617.13,418.31 -617.13,494.09 -565.94,545.28 -187.01,545.28 -98.43,456.69 68.9,456.69 v1(143.7,531.5) 172.24,502.95 ; -86.61,190.81 -72.83,177.03 -59.06,177.03 -39.15,157.12 -39.15,137.46 -34,132.32 ; 158.46,260.83 318.9,260.83 407.48,349.41 407.48,483.27 ; 172.24,502.95 199.8,530.51 324.8,530.51 372.05,483.27 407.48,483.27
  Bottom Layer w8: -91.56,178.17 U2.8 ; U2.1 -91.56,343.48 ; U2.2 -71.86,343.5
  Bottom Layer w12: VIB.2 -718.5,-525.59 -692.91,-551.18 CR1.1 -332.19,-551.18 -329.44,-553.94 -292.61,-553.94 -288.47,-549.79 -223.02,-549.79 -226.76,-546.06 -226.76,-523.13 -229.66,-520.23 -229.66,-510.29 -205.59,-486.22 -61.02,-486.22 -17.95,-443.14 -17.95,-323.51 -19.1,-322.36 -19.1,-302.75 -31.5,-290.35 ; v1(-531.5,-113.33) -444.88,-113.33 ; U4.10 -393.7,468.5 -399.21,474.02 C8.2 -425.2,511.81 -409.45,527.56 -366.14,527.56 ; -317.72,428.15 -317.72,440.76 -336.61,459.65 U4.1 -336.61,498.03 -366.14,527.56 ; U4.6 -316.93,390.75 -303.15,376.97 -303.15,346.46 ; R5.2 -164.37,531.5 -172.74,539.86 ; R6.2 -89.86,408.46 -78.89,397.49 ; -91.56,178.17 -91.56,168.33 -104.38,155.51 -124.02,155.51 ; -91.56,343.48 -91.56,359.25 ; -71.86,343.5 -71.86,352.22 -78.89,359.25 ; v1(-37.4,-245.08) -31.5,-250.98 -31.5,-290.35 ; U5.1 -55.12,421.26 -78.89,397.49 ; U5.12 45.28,419.39 44.48,420.18 44.48,432.64 6.7,470.42 6.7,481.39 5.91,482.19 U5.5 5.02,487.6 5.02,504.78 -2.01,511.81 -25.59,511.81 -36.42,522.64 -36.42,544.68 C9.2 -65.94,546.26 -81.69,562.01 -145.67,562.01 -167.82,539.86 -172.74,539.86 ; v1(62.01,-23.25) 56.72,-23.25 39.98,-6.51 37.03,-6.51 -66.93,97.44 -274.61,97.44 -446.85,269.68 -446.85,307.09 -446.36,307.58 -446.36,351.38 ; U5.8 104.33,480.32 116.14,492.13 116.14,505.91 ; C10.2 80.12,546.26 86.32,540.06 86.32,519.98 100.39,505.91 116.14,505.91 ; v1(143.7,531.5) 141.73,531.5 116.14,505.91 ; v1(207.68,467.52) 208.08,467.52 242.53,433.07 303.15,433.07 318.9,417.32 318.9,403.15 C13.1 346.46,401.57 353.35,408.46 U6.10 ; C11.2 317.72,526.38 317.72,492.46 R7.1 363.05,491.28 ; U6.12 385.07,469.26 363.05,491.28 ; v1(407.48,530.51) 402.28,530.51 363.05,491.28 ; -446.36,351.38 -462.6,351.38 -588.27,225.71 -588.27,136.4 -596.46,128.21 v1(-596.46,80.57) -516.59,80.57 -444.88,8.86 -444.88,-113.33 ; -446.36,351.38 -395.67,351.38 v1(-390.75,346.46) -303.15,346.46 ; -444.88,-113.33 -235.1,-113.33 -58.07,-290.35 -31.5,-290.35 ; -366.14,527.56 -334.65,559.06 -191.93,559.06 -172.74,539.86 ; -303.15,346.46 -303.15,324.8 -280.51,302.17 -280.51,200.79 -235.24,155.51 -124.02,155.51 ; -124.02,155.51 -138.78,170.28 -138.78,342.52 -122.05,359.25 -91.56,359.25 ; -91.56,359.25 -78.89,359.25 ; -78.89,359.25 -78.89,397.49
GND: BAT.2 C1.1 C2.1 C3.1 C4.1 C5.2 C6.2 C7.1 C8.1 C9.1 C10.1 C11.1 C13.2 C14.2 C15.1 C16.2 C17.1 C18.2 C19.1 C20.1 C21.2 C22.1 C23.2 C24.1 C25.1 C26.1 C27.2 D4.2 F1.A2 F1.B1 F1.B2 F1.B3 J1.A1-B12 J1.B1-A12 J2.1 O1.2 O1.4 Q1.2 R1.2 R2.2 R4.2 R10.1 R11.2 R14.2 R18.2 U1.2 U2.3 U2.4 U3.6 U3.7 U3.9 U4.3 U4.5 U4.8 U4.9 U5.6 U5.7 U6.6 U7.22 U7.32 U7.49 | length 11864.7
  Top Layer w12: v1(-659.45,176.18) -655.95,176.18 -622.05,142.28 -622.05,123.88 ; v1(-551.18,-215.55) -551.18,-162.54 ; F1.B1 F1.B2 ; R14.2 -622.05,123.88 ; F1.B3 F1.B2 ; v1(-484.25,479.46) -482.56,481.16 -303.15,481.16 ; O1.4 -494.09,-145.81 -510.83,-162.54 -551.18,-162.54 ; O1.2 -414.49,-186.28 -353.98,-186.28 v1(-353.12,-185.41) ; C17.1 -286.71,308.62 -286.71,272.2 C25.1 -284.25,270.53 -278.05,264.32 -278.05,254.6 -268.77,245.32 -257.97,245.32 -234.33,221.68 v1(-224.04,221.68) ; v1(-224.41,480.68) -229.55,485.83 -271.05,485.83 -273.41,488.19 -296.12,488.19 -303.15,481.16 ; C27.2@-179.53,-181.24 -180.02,-180.75 -180.02,-122.28 U7.32 -180.12,-18.84 U7.49 -278.54,-58.21 U7.22 -374.02,-58.21 -379.33,-63.53 -406.5,-63.53 -445.87,-63.53 -446.46,-64.12 -508.86,-64.12 -523.62,-49.35 ; R18.2 -172.06,339.75 -172.06,366.92 ; v1(-153.54,-411.22) -143.26,-411.22 -124.97,-429.51 -111.99,-429.51 -109.98,-431.52 -90.55,-431.52 ; C21.2 C20.1 ; C15.1 -28.14,-188.13 11.81,-228.09 11.81,-279.53 4.78,-286.56 -86.22,-286.56 C20.1 ; C26.1 -19.68,211.47 -15.26,207.05 ; C3.1 -41.34,-503.54 -35.13,-497.34 -16.04,-497.34 -2.95,-484.25 ; C16.2 -10.83,202.62 -15.26,207.05 ; 3.49,304.13 11.81,295.8 11.81,234.11 -15.26,207.05 ; v1(30.51,320.87) 20.23,320.87 4.43,305.06 -1.88,311.37 -13.48,311.37 -19.68,317.58 -19.68,319.15 -38.98,338.44 C24.1 -85.32,343.64 -85.32,359.9 -92.35,366.92 -172.06,366.92 ; C22.1 71.53,-68.83 111.15,-68.83 R10.1 111.22,-65.1 110.73,-64.61 110.73,-43.41 130.89,-23.25 v1(137.8,-23.25) ; v1(80.78,-270.67) 85.63,-270.67 116.14,-301.18 ; U1.2 -2.95,-484.25 ; v1@139.08,-22.94 187.31,-22.94 208.66,-44.29 298.23,-44.29 370.08,27.56 D4.2 ; v1(203.74,-321.85) 240.16,-285.43 296.85,-285.43 296.85,-320.87 297.64,-320.87 ; J2.1 250,-218.5 ; C6.2 276.57,-341.14 282.78,-334.94 283.57,-334.94 297.64,-320.87 ; R1.2 297.64,-320.87 ; U3.6 360.24,-469.3 360.57,-469.64 C5.2 385.24,-513.39 393.7,-504.92 ; U3.7@380.02,-465.65 U3.7 379.92,-491.14 393.7,-504.92 ; U3.9 553.35,-442.91 ; R2.2 435.04,-320.87 441.54,-314.37 441.54,-313.53 448.57,-306.5 C7.1 479.56,-307.71 516.51,-307.71 R4.2 517.72,-202.76 ; v1(503.94,527.56) 529.53,501.97 565.94,501.97 597.44,470.47 597.44,424.2 578.74,405.5 578.74,350.39 612.2,350.39 ; J1.A1-B12@582.66,-126 531.48,-126 517.72,-139.76 517.72,-202.76 ; J1.B1-A12@582.66,126 510.81,126 502.95,133.86 502.95,241.14 612.2,350.39 ; BAT.2 671.26,-529.53 684.45,-516.34 C4.1 553.35,-442.91 ; v1(793.31,350.39) 612.2,350.39 ; -622.05,123.88 -644.68,101.24 -644.68,63.84 -617.13,36.28 C14.2 -535.43,33.72 -535.43,11.81 -523.62,0 F1.B2 ; -551.18,-162.54 -579.72,-134 -579.72,-92.66 -550.2,-63.13 -537.4,-63.13 -523.62,-49.35 ; -523.62,-49.35 F1.A2 F1.B2 ; -303.15,481.16 -303.15,417.32 -295.28,409.45 -277.35,409.45 -271.35,403.45 -230.27,403.45 v1(-228.35,401.53) -228.26,401.53 -193.65,366.92 -172.06,366.92 ; -90.55,-431.52 -90.55,-417.32 -74.8,-401.57 ; -90.55,-431.52 -90.55,-445.73 -74.07,-462.2 -42.13,-462.2 -35.13,-469.2 -18.01,-469.2 -2.95,-484.25 ; C20.1 -89.57,-318.29 -118.86,-347.58 -118.86,-357.52 -74.8,-401.57 ; -74.8,-401.57 -62.99,-389.76 C1.1 46.46,-389.76 52.66,-383.56 52.66,-364.66 116.14,-301.18 ; 116.14,-301.18 198.82,-218.5 250,-218.5 ; 250,-218.5 296.85,-218.5 340.16,-175.2 462.39,-175.2 489.95,-202.76 517.72,-202.76 ; 393.7,-504.92 v1(429.13,-540.35) 507.87,-540.35 549.21,-499.02 549.21,-447.05 553.35,-442.91
  Bottom Layer w8: U2.3 -52.16,343.5 ; U2.4 -32.46,343.48
  Bottom Layer w12: v1(-659.45,176.18) -659.45,273.62 -493.7,439.37 ; v1(-551.18,-215.55) -450.79,-215.55 -431.1,-235.24 -310.04,-235.24 -288.32,-213.51 -288.32,-186.16 ; v1(-484.25,479.46) -491.52,472.19 -491.52,441.55 -493.7,439.37 ; U4.8 -383.46,429.13 -393.7,439.37 ; U4.9 -384.25,448.82 -393.7,439.37 ; v1(-353.12,-185.41) -352.36,-186.16 -288.32,-186.16 ; R11.2 -312.01,-399.61 -302.17,-389.76 -180.12,-389.76 -166.34,-375.98 -141.73,-375.98 ; U4.5 -275.73,429.13 -268.7,422.1 -268.7,381.89 -245.08,358.27 -228.35,358.27 ; U4.3 -296.26,468.5 -277.56,487.2 -230.93,487.2 v1(-224.41,480.68) ; v1(-228.35,401.53) -228.35,358.27 ; v1(-224.04,221.68) -228.35,225.98 -228.35,358.27 ; v1(-153.54,-411.22) -153.54,-404.77 -141.73,-392.95 -141.73,-375.98 ; -52.16,343.5 -52.16,346.46 -42.32,356.3 ; -32.46,343.48 -32.46,346.43 -42.32,356.3 ; C9.1 C10.1@43.9,546.26 ; U5.6 25.59,527.95 C10.1@43.9,546.26 ; v1(30.51,320.87) -21.65,373.03 -34.45,373.03 -42.32,365.16 -42.32,356.3 ; C10.1@44.98,545.96 44.98,487.01 U5.7 ; v1(80.78,-270.67) 80.78,-260.39 96.83,-244.34 96.83,-244.27 105.31,-235.78 105.31,-234.25 ; v1(137.8,-23.25) 137.8,-77.76 69.88,-145.67 69.88,-198.82 105.31,-234.25 ; v1(203.74,-321.85) 116.14,-234.25 105.31,-234.25 ; C11.1@281.1,527.56 274.9,533.76 274.9,534.55 237.6,571.85 ; C11.1 275.68,521.35 268.66,521.35 267.87,520.57 189.86,520.57 155.51,486.22 155.51,462.6 216.54,401.57 C13.2 ; v1(429.13,-540.35) 505.91,-540.35 601.38,-444.88 682.09,-444.88 710.63,-416.34 710.63,-335.63 681.1,-306.1 556.1,-306.1 516.73,-266.73 516.73,-210.77 509.7,-203.74 ; v1(456.69,-175.2) 460.42,-175.2 488.96,-203.74 509.7,-203.74 ; U6.6 546.26,349.41 792.32,349.41 v1(793.31,350.39) ; v1(503.94,527.56) 459.7,571.8 354.38,571.8 354.33,571.85 237.6,571.85 ; 546.26,349.09 546.26,270.67 454.72,179.13 454.72,-78.74 509.7,-133.72 509.7,-203.74 ; -493.7,439.37 C8.1 -393.7,439.37 ; -288.32,-186.16 -224.27,-186.16 -141.73,-268.7 -141.73,-375.98 ; C10.1@43.9,546.26 44.29,546.65 44.29,562.01 54.13,571.85 237.6,571.85
NetANT1_1: ANT1.1 F1.A1 | length 126.5
  Top Layer w12: ANT1.1 F1.A1
NetANT2_1: ANT2.1 C12.1 U6.4 | length 389.2
  Bottom Layer w12: U6.4 659.45,388.78 686.42,415.75 686.42,511.22 669.26,528.37 ANT2.1@625.17,528.37 ; ANT2.1 ANT2.1@628.29,525.25
NetANT2_2: ANT2.2 C12.2 U6.5 | length 428.9
  Bottom Layer w12: U6.5 672.24,369.09 721.06,417.91 C12.2 721.06,512.4 738.19,529.53 785.43,529.53 ANT2.2
NetC2_2: C2.2 U1.4 | length 71
  Top Layer w12: C2.2 -9.45,-427.56 9.84,-446.85 U1.4
NetC5_1: C5.1 U3.5 | length 53.9
  Top Layer w12: C5.1 326.77,-512.54 326.77,-496.06 340.46,-482.38 340.46,-465.65 U3.5
NetC7_2: C7.2 R3.1 U3.12 | length 97
  Top Layer w12: U3.12 422.34,-383.76 475.35,-383.76 R3.1 478.28,-380.84 478.28,-341.21 C7.2
NetC23_1: C23.1 O2.1 U7.2 | length 209.6
  Top Layer w12: U7.2 -121.06,224.27 -67.91,277.42 O2.1 -66.54,283.72 C23.1
NetC24_2: C24.2 O2.2 U7.3 | length 205.6
  Top Layer w12: U7.3 -140.75,256.7 -140.65,256.8 -140.65,268.66 -115.16,294.15 -115.16,338.05 C24.2
NetC25_2: C25.2 R19.1 U7.7 | length 226
  Top Layer w12: R19.1 -249.21,308.58 -249.21,271.71 C25.2 -219.15,270.53 -186.04,237.42 -186.04,193.74 -219.49,160.29 U7.7
NetC27_1: C27.1 L1.2 U7.31 | length 134.2
  Top Layer w12: C27.1 -221.06,-242.66 L1.2 ; C27.1@-214.17,-181.24 -214.17,-155.26 -199.9,-140.98 -199.9,-122.28 U7.31
NetCR1_2: CR1.2 Q1.1 VIB.1 | length 239.1
  Bottom Layer w12: VIB.1 -616.14,-438.88 -592.61,-415.35 CR1.2 -524.61,-416.34 -524.61,-469.49 -501.97,-492.13 Q1.1
NetD4_1: D4.1 U7.37 | length 987.3
  Top Layer w12: U7.37 -57.93,-97.58 17.72,-173.23 v1(114.17,-173.23) ; D4.1@405.51,64.96 410.43,69.88 v1(410.43,129.92)
  Bottom Layer w12: v1(114.17,-173.23) 114.17,-183.51 135.53,-204.87 135.53,-221.16 159.45,-245.08 378.8,-245.08 385.83,-238.05 385.83,-61.74 410.43,-37.13 v1(410.43,129.92)
NetD4_3: D4.3 U7.38 | length 579.8
  Top Layer w12: U7.38 -42.18,-77.9 10.83,-130.91 214.88,-130.91 220.99,-124.8 279.01,-124.8 285.12,-130.91 303.15,-130.91 393.8,-40.26 393.8,-15.65 399.61,-9.84 D4.3
NetD4_4: D4.4 J1.A6 | length 84.6
  Top Layer w12: D4.4@496.06,-9.84 565.15,-9.84 565.19,-9.8 J1.A6@580.69,-9.8
NetD4_6: D4.6 J1.A7 | length 129.3
  Top Layer w12: D4.6@496.06,64.96 532.48,64.96 540.35,57.09 540.35,19.68 550.14,9.9 J1.A7@580.69,9.9
NetF1_A3: F1.A3 U7.21 | length 158
  Top Layer w12: F1.A3 U7.21
NetJ1_A5: J1.A5 R8.2 | length 102.3
  Top Layer w12: R8.2@482.42,-59.06 520.95,-59.06 530.81,-49.2 J1.A5@580.69,-49.2
NetJ2_2: J2.2 R10.2 U7.39 | length 352.8
  Top Layer w12: U7.39 -33.89,-58.21 10.26,-102.36 R10.2@107.92,-102.36 ; R10.2 111.22,-99.41 114.52,-102.71 115.37,-102.71 116,-103.35 225.35,-103.35 246.02,-82.68 J2.2
NetJ2_3: J2.3 R9.2 U7.41 | length 349.3
  Top Layer w12: U7.41 -44.06,-18.84 -35.17,-9.96 R9.2 -7.1,-8.93 11.74,-8.93 36.42,15.75 189.96,15.75 209.65,-3.94 J2.3
NetJ2_5: J2.5
NetL1_1: L1.1 L2.1 | length 64.8
  Top Layer w12: L1.1 -215.55,-341.77 -201.87,-355.45 L2.1
NetL2_2: L2.2 U7.33 | length 202.2
  Top Layer w12: U7.33 -160.43,-163.64 -160.43,-198.83 -160.43,-321.1 -159.54,-321.99 L2.2
NetL3_2: L3.2 U7.8 | length 209.5
  Top Layer w12: L3.2 -328.74,272.64 -311.03,254.93 -311.03,252.94 -303.42,245.32 -301.43,245.32 -239.17,183.07 U7.8
NetO1_1: O1.1 U7.25 | length 311.9
  Top Layer w12: O1.1 -469.49,-188.13 -469.49,-212.74 -432.23,-250 -351.24,-250 -305.12,-203.88 -305.12,-163.53 -317.91,-150.73 U7.25
NetO1_3: O1.3 U7.24 | length 93
  Top Layer w12: O1.3 -386.81,-145.81 -376.97,-135.97 -376.97,-127.3 U7.24@-347.35,-97.68
NetQ1_3: Q1.3 R11.1 R12.1 | length 101.9
  Bottom Layer w12: Q1.3 -374.58,-454.3 -312.43,-454.3 R11.1 -311.52,-454.37 -311.52,-491.49 R12.1
NetR1_1: R1.1 U3.15 | length 42.8
  Top Layer w12: R1.1 356.3,-320.87 360.24,-324.8 U3.15
NetR2_1: R2.1 U3.13 U7.16 | length 1782.5
  Top Layer w12: v1(-522.64,176.18) -521.65,175.2 -443.33,175.2 -365.35,97.21 -365.35,68.71 -356.63,59.99 -342.61,59.99 U7.16 ; v1(134.84,-348.43) 142.11,-341.15 142.11,-314.75 214.74,-242.13 v1(458.66,-242.13) 408.53,-292.26 408.53,-317.57 405.23,-320.87 403.54,-320.87 399.61,-324.8 U3.13
  Bottom Layer w12: v1(-522.64,176.18) -522.26,175.8 -404.15,175.8 -298.23,69.88 -92.52,69.88 41.78,-64.42 41.78,-294.73 91.84,-344.8 131.21,-344.8 v1(134.84,-348.43)
NetR3_2: R3.2 R4.1 U3.8 | length 389.1
  Top Layer w12: U3.8 399.61,-482.14 406.64,-489.17 v1(481.3,-489.17) ; R3.2 508.51,-381.4 567.97,-381.4 576.33,-373.03 v1(586.61,-373.03) ; R3.2@508.86,-380.91 517.72,-372.05 R4.1
  Bottom Layer w12: v1(481.3,-489.17) 481.3,-483.76 586.61,-378.44 v1(586.61,-373.03)
NetR5_1: R5.1 U4.2 U5.3 | length 373.7
  Bottom Layer w12: U4.2 -316.93,500.98 -287.4,530.51 -202.76,530.51 -185.67,513.43 -185.67,490.93 -175.12,480.38 -167.67,480.38 -164.37,477.08 R5.1 -139.62,476.24 -124.02,460.63 U5.3
NetR6_1: R6.1 U4.4 U5.2 | length 321.7
  Bottom Layer w12: U4.4 -247.7,448.82 -240.56,441.68 -198.79,441.68 -192.5,447.97 -150.73,447.97 -143.7,440.94 ; R6.1 -153.68,430.96 -143.7,440.94 ; U5.2 -143.7,440.94
NetR7_2: R7.2 U6.11 U7.45 | length 1094.2
  Top Layer w12: U7.45 156.36,59.9 211.61,115.16 277.56,115.16 305.12,142.72 305.12,203.74 384.15,282.78 415.65,282.78 v1(418.31,285.43) ; v1(265.08,475.8) 263.78,474.49 263.78,330.41 284.08,310.11 v1(284.08,299.83)
  Bottom Layer w12: v1(265.08,475.8) 274.06,475.8 288.38,461.47 R7.2 319.74,460.63 335.49,460.63 342.52,453.6 342.52,444.88 359.25,428.15 U6.11 ; v1(284.08,299.83) 291.28,292.63 400.83,292.63 408.02,285.43 v1(418.31,285.43)
NetR12_2: R12.2 U7.36 | length 758.2
  Top Layer w12: U7.36 -101.38,-151.34 -94.25,-158.46 -29.53,-158.46 38.39,-226.38 38.39,-287.4 -13.1,-338.89 -56.17,-338.89 v1(-56.95,-339.67)
  Bottom Layer w12: R12.2 -275.73,-521.79 -266.98,-513.04 -266.98,-487.22 -237.98,-458.22 -114.72,-458.22 -58.42,-401.93 -58.42,-341.14 v1(-56.95,-339.67)
NetR13_1: R13.1 R14.1 U7.19 | length 236.1
  Top Layer w12: R14.1 R13.1 -504.92,86.47 -419.29,0.84 U7.19
NetR15_1: R15.1 U2.6 U5.13 U6.8 U7.46 | length 1544.3
  Top Layer w12: U7.46 -76.68,79.68 75.74,79.68 101.38,105.32 ; v1(97.44,258.86) 98.36,258.86 128.89,228.33 128.89,160.38 94.49,125.98 94.49,112.2 101.38,105.32 ; v1(112.8,338.2) 115.91,335.09 146.5,335.09 180.43,301.17 222.46,301.17 v1(223.43,300.2) ; R15.1 115.3,91.4 101.38,105.32
  Bottom Layer w8: -52.16,177.17 U2.6
  Bottom Layer w12: -52.17,177.17 -52.17,158.46 -18.7,125 95.47,125 175.88,205.41 175.88,271.35 184.37,279.84 192.78,279.84 213.14,300.2 v1(223.43,300.2) ; U5.13 25.59,410.34 26.39,409.54 26.39,398.57 33.42,391.54 114.33,391.54 137.37,368.5 150.59,368.5 267.03,368.5 267.63,369.09 U6.8@384.95,369.09 ; v1(97.44,258.86) 97.44,260.24 150.59,313.39 150.59,340.29 ; v1(112.8,338.2) 114.89,340.29 150.59,340.29 ; 151.91,368.5 150.59,367.18 150.59,340.29
NetR16_1: R16.1 U2.5 U5.14 U6.7 U7.47 | length 1130.3
  Top Layer w12: U7.47 R16.1@32.48,99.27 ; R16.1 58.92,103.07 70.87,115.02 70.87,155.07 87.6,171.81 v1(87.6,179.13)
  Bottom Layer w8: -32.46,177.19 U2.5
  Bottom Layer w12: -32.46,177.19 -32.46,167.35 -18.66,153.54 1.97,153.54 67.91,219.49 ; U5.14 5.91,376.97 22.64,360.24 64.82,360.24 71.85,353.21 71.85,290.51 54.13,272.79 54.13,233.27 67.91,219.49 ; v1(87.6,179.13) 97.88,179.13 120.24,201.49 123.05,201.49 133.59,212.03 133.59,219.49 ; U6.7 187.99,349.41 169.59,331.01 169.59,293.35 151.57,275.33 151.57,246.06 133.59,228.08 133.59,219.49 ; 67.91,219.49 133.59,219.49
NetR17_1: R17.1 R18.1 U7.4 | length 230.2
  Top Layer w12: R17.1 -207.33,305.47 -207.33,298.72 -173.23,264.62 ; R18.1 -173.23,264.62 ; U7.4 -160.43,251.83 -173.23,264.62
NetU2_7: U2.7 U7.9 | length 662.3
  Top Layer w12: v1(-389.76,287.4) -382.49,280.13 -365.09,280.13 -258.86,173.9 U7.9
  Bottom Layer w8: -71.86,177.17 U2.7
  Bottom Layer w12: v1(-389.76,287.4) -311.82,209.46 -311.82,196.66 -241.14,125.98 -97.44,125.98 -71.86,151.57 -71.86,177.17
NetU3_3: U3.3 U7.17 | length 1315
  Top Layer w12: v1(-453.74,126.97) -446.47,119.7 -418.32,119.7 -388.18,89.56 -388.18,57.05 -371.35,40.21 U7.17 ; v1(200.79,-441.93) 208.06,-434.66 238.45,-434.66 249.79,-423.32 317.82,-423.32 U3.3
  Bottom Layer w12: v1(-453.74,126.97) -448.14,121.37 -410.74,121.37 -330.71,41.34 -110.24,41.34 21.78,-90.68 21.78,-303.02 22.05,-303.29 22.05,-319.3 142.04,-439.28 198.14,-439.28 v1(200.79,-441.93)
NetU3_4: U3.4 U7.18 | length 1272.9
  Top Layer w12: v1(-426.18,73.82) -426.18,63.54 -401.94,39.29 -401.94,37.23 -385.24,20.53 U7.18 ; v1(247.05,-490.16) 254.32,-482.89 254.32,-457.7 269.1,-442.91 U3.4
  Bottom Layer w12: v1(-426.18,73.82) -390.33,37.97 -390.33,25.63 -361.75,-2.95 -123.03,-2.95 1.78,-127.76 1.78,-311.3 2.05,-311.57 2.05,-368.19 124.02,-490.16 v1(247.05,-490.16)
NetU3_14: U3.14
NetU4_7: U4.7 U7.13 | length 1112
  Top Layer w12: v1(-712.6,244.09) -708.66,248.03 -487.2,248.03 -358.22,119.05 -342.61,119.05 U7.13
  Bottom Layer w12: v1(-712.6,244.09) -712.6,147.64 -685.04,120.08 -632.87,120.08 -608.27,144.69 -608.27,264.76 -483.27,389.76 -350.39,389.76 -337.5,402.65 -337.5,417.91 U4.7
NetU5_4: U5.4 U7.12 | length 1325.9
  Top Layer w12: U7.12 -348.29,143.56 -480.32,275.59 -623.03,275.59 -686.02,338.58 -686.02,476.38 -595.47,566.93 -150.59,566.93 v1(-96.46,512.8)
  Bottom Layer w12: v1(-96.46,512.8) -63.98,480.32 U5.4
NetU5_9: U5.9 U7.10 | length 1494.5
  Top Layer w12: v1(-635.83,369.09) -564.96,298.23 -468.5,298.23 -398.62,228.35 -340.18,228.35 -278.64,166.81 -278.64,143.66 U7.10 ; v1(-564.96,479.33) -524.61,519.68 -193.9,519.68 -80.71,406.5 146.65,406.5 v1(150.59,410.43)
  Bottom Layer w12: v1(-635.83,369.09) -566.93,437.99 -566.93,438.98 -564.96,440.94 v1(-564.96,479.33) ; U5.9 117.13,460.63 132.79,444.96 132.79,438.51 150.59,420.72 v1(150.59,410.43)
NetU6_1: U6.1 U7.44 | length 995
  Top Layer w12: U7.44 234.21,40.21 238.68,35.75 318.23,35.75 364.17,81.69 364.17,147.64 395.67,179.13 436.02,179.13 476.38,219.49 476.38,245.08 546.26,314.96 v1(546.26,449.8)
  Bottom Layer w12: U6.1 544.29,447.83 v1(546.26,449.8)
NetU7_5: U7.5
NetU7_6: U7.6
NetU7_11: U7.11
NetU7_14: U7.14
NetU7_15: U7.15
NetU7_28: U7.28
NetU7_29: U7.29
NetU7_30: U7.30
NetU7_42: U7.42
NetU7_43: U7.43
VBAT: BAT.1 C1.2 C4.2 U1.1 U1.3 U3.10 U3.11 | length 1511.4
  Top Layer w12: C1.2 141.73,-389.76 160.43,-408.46 160.43,-465.55 ; U1.1 140.75,-521.65 149.11,-513.29 ; U1.3 141.73,-446.85 160.43,-465.55 ; v1(208.66,-551.18) 198.38,-551.18 174.56,-527.36 163.19,-527.36 149.11,-513.29 ; U3.11 442.54,-403.54 449.56,-410.57 449.56,-420.51 446.85,-423.23 U3.10 U3.10@422.34,-423.13 ; 449.56,-415.35 705.07,-415.35 ; v1(656.5,-368.11) 663.77,-375.38 689.36,-375.38 705.07,-391.1 705.07,-415.35 ; BAT.1 734.25,-529.53 719.09,-514.37 C4.2 718.31,-442.91 712.1,-436.71 712.1,-422.38 705.07,-415.35 ; 149.11,-513.29 160.43,-501.97 160.43,-465.55
  Bottom Layer w12: v1(208.66,-551.18) 338.44,-551.18 558.92,-330.71 624.6,-330.71 656.5,-362.6 v1(656.5,-368.11)
VUSB: C6.1 D4.5 J1.A4-B9 J1.B4-A9 R8.1 U3.1 U3.2 | length 1127.7
  Top Layer w12: v1(200.79,-380.91) 202.95,-378.74 274.41,-378.74 C6.1 279.53,-379.53 C6.1@279.53,-380.32 ; U3.2 285.43,-403.54 279.53,-397.64 C6.1@279.53,-380.32 ; U3.1 283.07,-383.86 C6.1@279.53,-380.32 ; v1(427.17,-115.16) 431.48,-110.84 466.17,-110.84 474.42,-102.59 474.42,-94.5 ; R8.1@453.46,-59.06 456.76,-62.36 456.76,-76.84 474.42,-94.5 ; R8.1 457.54,27.56 ; D4.5 457.54,27.56 ; J1.B4-A9@580.69,94.5 465.56,94.5 457.54,86.47 457.54,27.56 ; J1.A4-B9 474.42,-94.5
  Bottom Layer w12: v1(200.79,-380.91) 205.71,-380.91 249.7,-336.92 249.7,-321.17 290.35,-280.51 323.82,-280.51 324.8,-279.53 380.91,-279.53 408.87,-251.57 408.87,-141.19 427.17,-122.89 v1(427.17,-115.16)
pads on no net: ANT1.2 J1.13 J1.14 J1.15 J1.16 J1.A8 J1.B5 J1.B6 J1.B7 J1.B8 J1.S_1_H1 J1.S_1_H2 J1.S_2_H1 J1.S_2_H2 J1.S_3_H1 J1.S_3_H2 J1.S_4_H1 J1.S_4_H2 U3.16 U3.17 U5.10 U5.11 U6.2 U6.3 U6.9 U6.13 U7.26 U7.27

## Polygon pours and split planes (outlines as drawn)
GND on Bottom Layer "NONET_L-01_P-001" (solid, pour order 0): -846.46,-590.55 -846.46,-230.32 -587.6,-230.32 -586.61,-229.33 -586.61,42.32 -845.47,42.32 -846.46,43.31 -845.47,44.29 -845.47,590.55 846.46,590.55 846.46,182.09 613.19,182.09 613.19,-182.09 847.44,-182.09 846.46,-183.07 846.46,-590.55
GND on Top Layer "NONET_L-01_P-001" (solid, pour order 1): -846.46,-590.55 -846.46,-230.32 -586.61,-230.32 -586.61,41.34 -846.46,41.34 -846.46,590.55 -845.47,589.57 846.46,589.57 846.46,182.09 613.19,182.09 613.19,-182.09 846.46,-182.09 846.46,-590.55

## Silkscreen, mask and mechanical layers (free items; w line width, h text height)
Mechanical 1: